# Altium PCB ESC.PcbDoc
Units mil, origin at the board's own origin, x right, y up, seen from the top; angles counter-clockwise.
Board outline 3605 x 1700 mil, 2 copper layers (Top Layer, Bottom Layer); 115 components, 68 nets, 363 pads, 12 vias.
Unrouted connection lines stored in the file: 183.
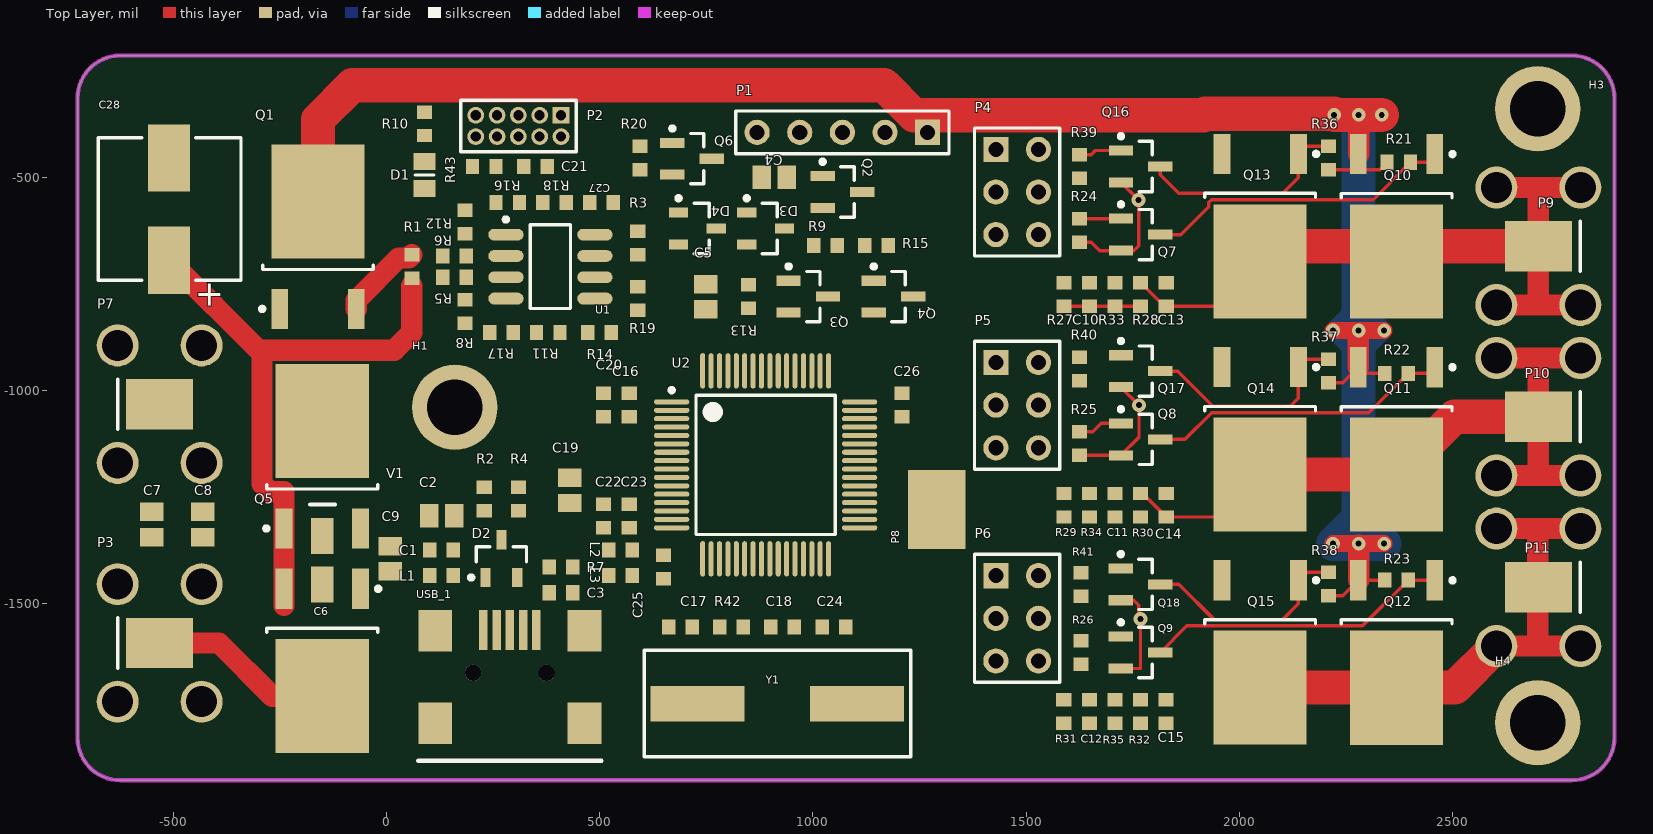
[diagram p0: Top Layer view]
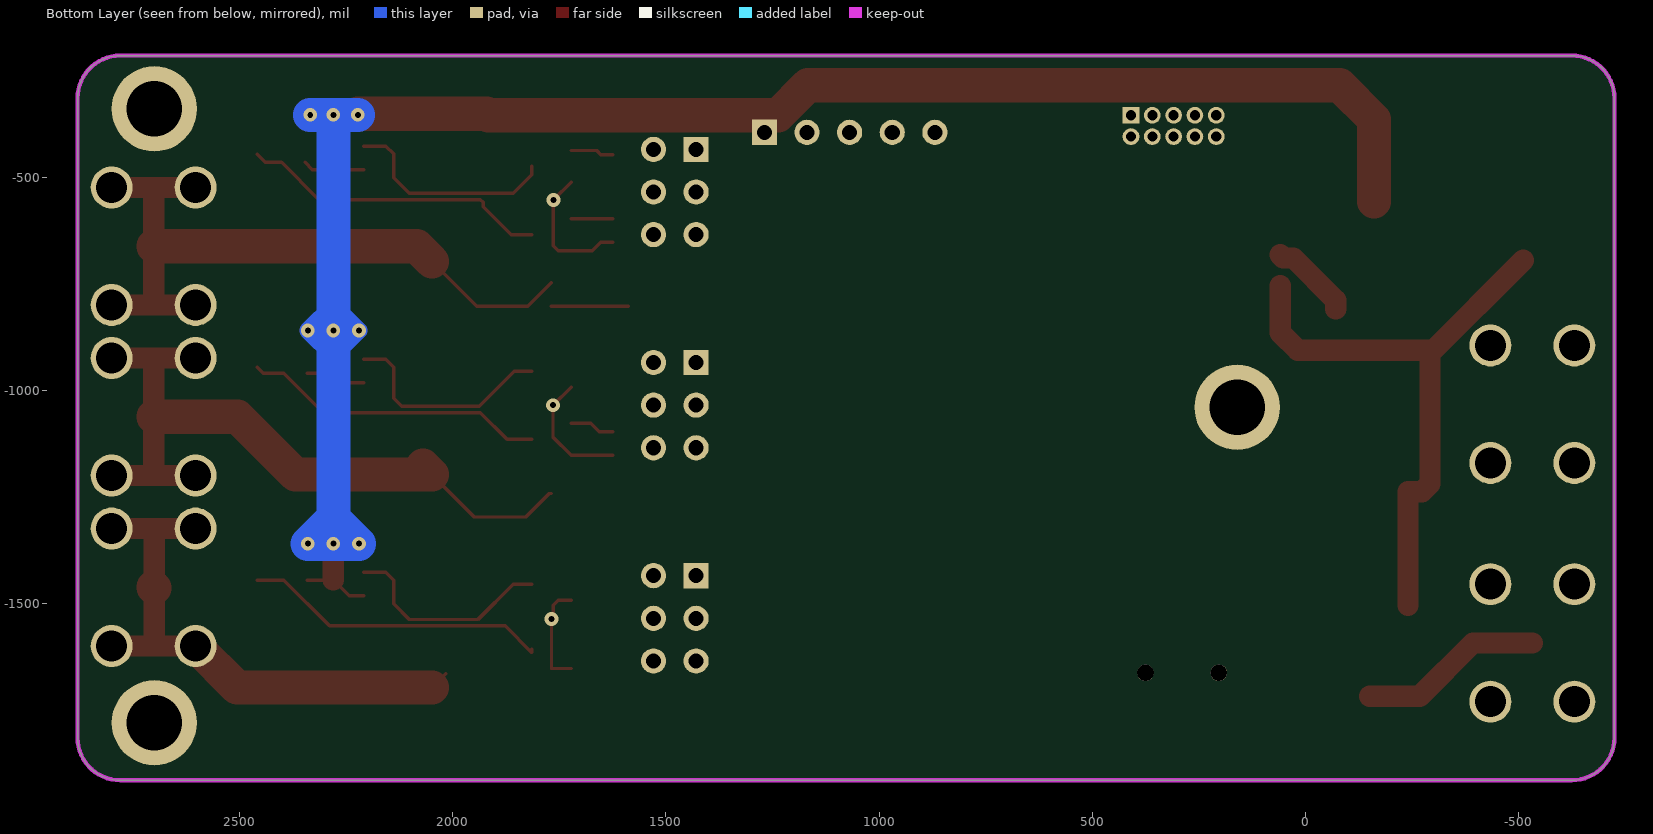
[diagram p1: Bottom Layer view, seen from below]

## Layer stack, top to bottom
Top Solder: solder mask 0.4, Solder Resist, Dk 3.5
Top Layer: signal copper 1.4
Dielectric1: dielectric 12.6, FR-4, Dk 4.8
Bottom Layer: signal copper 1.4
Bottom Solder: solder mask 0.4, Solder Resist, Dk 3.5

## Board outline
-625,-1915 cw(c-625,-1815) -725,-1815 -725,-315 cw(c-625,-315) -625,-215 2780,-215 cw(c2780,-315) 2880,-315 2880,-1815 cw(c2780,-1815) 2780,-1915

## Design rules (kind name [scope] priority, off if disabled: settings)
AssemblyTestPointUsage [All] p1 off:
AssemblyTestpoint [All] p1 off: testpointundercomponent=TRUE minsize=40 maxsize=100 preferedsize=60 minholesize=0 maxholesize=40 preferedholesize=32 testpointgrid=1 usegrid=TRUE gridtolerance=0.01 allowsidetop=TRUE allowsidebottom=TRUE
Clearance Clearance_1 [IsVia vs IsVia] p1: gap=10
Clearance [All] p2: gap=7
DiffPairsRouting [All] p1: maxlimit=200 minlimit=10 mostfreqgap=10 toplayer_minwidth=15 toplayer_maxwidth=15 toplayer_prefwidth=15 bottomlayer_minwidth=15 bottomlayer_maxwidth=15 bottomlayer_prefwidth=15 maxuncoupledlength=1000
FabricationTestPointUsage [All] p1 off: valid=0 allowmultiple=FALSE
FabricationTestpoint [All] p1 off: side=3 testpointundercomponent=TRUE minsize=40 maxsize=100 preferedsize=60 minholesize=0 maxholesize=40 preferedholesize=32 testpointgrid=1 allowsidetop=TRUE allowsidebottom=TRUE usegrid=TRUE gridtolerance=0.01
HoleSize [All] p1: absolutevalues=TRUE maxlimit=250 minlimit=1 maxpercent=80.000 minpercent=20.000
HoleToHoleClearance [All] p1: gap=12 allowstackedmicrovias=FALSE
MinimumSolderMaskSliver [All] p1: minsoldermaskwidth=6
PlaneConnect [All] p1: planeconnectstyle=Relief reliefexpansion=20 reliefentries=4 reliefconductorwidth=20 reliefairgap=10
PolygonConnect PolygonConnect_1 [(InPadClass('All Pads'))] p1: connectstyle=Relief reliefconductorwidth=10 reliefentries=4 polygonreliefangle="90 Angle" airgapwidth=10
PolygonConnect [All] p2: connectstyle=Direct reliefconductorwidth=10 reliefentries=4 polygonreliefangle="90 Angle" airgapwidth=10
RoutingVias [All] p1: holewidth=14 width=32 viastyle="Through Hole" minholewidth=14 minwidth=32 maxholewidth=14 maxwidth=32
SilkToSilkClearance [All] p1: silktosilkclearance=4
SilkToSolderMaskClearance SilkscreenOverComponentPads [IsPad] p1: minsilkscreentomaskgap=4 clearancetoexposedcopper=TRUE
SolderMaskExpansion SolderMaskExpansion_4 [InComponent('U4')] p1: expansion=2
SolderMaskExpansion SolderMaskExpansion_5 [InComponent('USB_1')] p2: expansion=2
SolderMaskExpansion SolderMaskExpansion_6 [InComponent('U2')] p3: expansion=6
SolderMaskExpansion SolderMaskExpansion_3 [InComponent('U8')] p4: expansion=2
SolderMaskExpansion SolderMaskExpansion_2 [InComponent('U6')] p5: expansion=6
SolderMaskExpansion SolderMaskExpansion_1 [InComponent('U9')] p6: expansion=6
SolderMaskExpansion [InComponent('U6')] p7: expansion=4
UnpouredPolygon [All] p1: allowunpoured=FALSE
Width Width_3 [InNet('GND')] p1: maxlimit=40 minlimit=6 preferedwidth=12
Width Width_2 [InNet('3.3V')] p2: maxlimit=40 minlimit=6 preferedwidth=12
Width Width_1 [InNet('5V')] p3: maxlimit=40 minlimit=6 preferedwidth=12
Width [All] p4: maxlimit=80 minlimit=8 preferedwidth=8 minimp=50.000000 maximp=50.000000 favimp=50.000000
18 further rules are at their usual default settings.

## Classes and differential pairs
differential pair U: +U_P -U_N
differential pair USB_MCU: +USB_MCU_P -USB_MCU_N

## Components (designator, comment, footprint, x,y, rotation, side; value= is the part's Value field where it differs from the comment)
C1 "0805" 1608[0603] 129.01,-1375 r0 top
C2 "0805" C0805 129.01,-1295 r0 top
C3 "0805" 1608[0603] 409.01,-1475 r180 top
C4 "0805" C0805 909.01,-500.51 r0 top
C5 "0805" C0805 749.01,-780.51 r270 top
C6 "Cap Pol1" 1206_C -150.99,-1398.78 r270 top
C7 "Cap" C0805 -550.99,-1315 r270 top
C8 "Cap" C0805 -430.99,-1315 r90 top
C9 "Cap" C0805 9.01,-1395 r90 top
C10 "0805" 1608[0603] 1648.7,-775 r270 top
C11 "0805" 1608[0603] 1708.7,-1269.76 r270 top
C12 "0805" 1608[0603] 1648.38,-1754.02 r270 top
C13 "0805" 1608[0603] 1828.7,-775 r270 top
C14 "0805" 1608[0603] 1828.7,-1269.76 r270 top
C15 "0805" 1608[0603] 1828.38,-1754.02 r270 top
C16 "0805" 1608[0603] 569.01,-1035 r90 top
C17 "0805" 1608[0603] 689.01,-1555 r0 top
C18 "0805" 1608[0603] 929.01,-1555 r180 top
C19 "0805" C0805 429.01,-1235 r270 top
C20 "0805" 1608[0603] 509.01,-1035 r270 top
C21 "0805" 1608[0603] 349.01,-475 r180 top
C22 "0805" 1608[0603] 509.01,-1295 r90 top
C23 "0805" 1608[0603] 569.01,-1295 r90 top
C24 "0805" 1608[0603] 1049.01,-1555 r180 top
C25 "0805" 1608[0603] 649.01,-1415 r90 top
C26 "0805" 1608[0603] 1209.01,-1035 r270 top
C27 "0805" 1608[0603] 504.01,-560 r0 top
C28 "Cap Pol1" ELE_CAP -510.99,-695 r180 top
D1 "LED3" 6-0805_L 89.01,-495 r90 top
D2 "Bat45C" SOT-23B_N 269.01,-1395 r90 top
D3 "Bat45C" SOT-23B_N 889.01,-620.51 r0 top
D4 "Bat45C" SOT-23B_N 729.01,-620.51 r0 top
H1 "stand_off" 4-40_screw_hole 160,-1040 r0 top
H3 "stand_off" 4-40_screw_hole 2700,-340 r0 top
H4 "stand_off" 4-40_screw_hole 2700,-1780 r0 top
L1 "FB" 1608[0603] 129.01,-1435 r0 top
L2 "FB" 1608[0603] 549.01,-1375 r0 top
L3 "FB" 1608[0603] 549.01,-1435 r0 top
P1 "Header 5" HDR1X5 1269.01,-395 r180 top
P2 "Header 5X2" MHDR2X5 409.01,-355 r180 top
P3 "Header" 8191_K -630.99,-1455 r0 top
P4 "Header 3X2" HDR2X3 1429.01,-435 r270 top
P5 "Header 3X2" HDR2X3 1429.01,-935 r270 top
P6 "Header 3X2" HDR2X3 1429.01,-1435 r270 top
P7 "Header" 8191_K -630.99,-895 r0 top
P8 "GND_CLIP" GND_CLIP 1290,-1280 r90 top
P9 "Header" 8191_K 2800,-800 r180 top
P10 "Header" 8191_K 2800,-1200 r180 top
P11 "Header" 8191_K 2800,-1600 r180 top
Q1 "PMOS-2" TO228P970-3_4AM -160.99,-640 r90 top
Q2 "PMOS-2" SOT-23_M 1069.01,-535 r0 top
Q3 "2N7002P" SOT-23_M 989.01,-780.51 r0 top
Q4 "2N7002P" SOT-23_M 1189.01,-780.51 r0 top
Q5 "PMOS-2" TO228P970-3_4AM -150.99,-1635 r270 top
Q6 "2N7002P" SOT-23_M 716.57,-457 r0 top
Q7 "2N7002P" SOT-23_M 1768.7,-635 r0 top
Q8 "2N7002P" SOT-23_M 1768.7,-1115.31 r0 top
Q9 "2N7002P" SOT-23_M 1768.38,-1615.31 r0 top
Q10 "PMOS-2" TO228P970-3_4AM 2369.01,-615.31 r270 top
Q11 "PMOS-2" TO228P970-3_4AM 2369.01,-1115.31 r270 top
Q12 "PMOS-2" TO228P970-3_4AM 2369.01,-1615.31 r270 top
Q13 "NMOS-2" TO228P970-3_4AM 2049.01,-615 r270 top
Q14 "NMOS-2" TO228P970-3_4AM 2049.01,-1115 r270 top
Q15 "NMOS-2" TO228P970-3_4AM 2049.01,-1615 r270 top
Q16 "2N7002P" SOT-23_M 1768.7,-475 r0 top
Q17 "2N7002P" SOT-23_M 1768.7,-955.31 r0 top
Q18 "2N7002P" SOT-23_M 1768.38,-1455.31 r0 top
R1 "Res1" 1608[0603] 59.01,-710 r90 top
R2 "Res1" 1608[0603] 229.01,-1255 r90 top
R3 "Res1" 1608[0603] 589.01,-655 r270 top
R4 "Res1" 1608[0603] 309.01,-1255 r90 top
R5 "Res1" 1608[0603] 159.01,-735 r0 top
R6 "Res1" 1608[0603] 159.01,-685 r180 top
R7 "Res1" 1608[0603] 409.01,-1415 r0 top
R8 "Res1" 1608[0603] 184.01,-815 r90 top
R9 "Res1" 1608[0603] 1029.01,-660.51 r0 top
R10 "Res1" 1608[0603] 89.01,-375 r90 top
R11 "Res1" 1608[0603] 379.01,-865 r180 top
R12 "Res1" 1608[0603] 184.01,-605 r270 top
R13 "Res1" 1608[0603] 849.01,-780.51 r270 top
R14 "Res1" 1608[0603] 499.01,-865 r0 top
R15 "Res1" 1608[0603] 1149.01,-660.51 r0 top
R16 "Res1" 1608[0603] 284.01,-560 r180 top
R17 "Res1" 1608[0603] 269.01,-865 r180 top
R18 "Res1" 1608[0603] 394.01,-560 r180 top
R19 "Res1" 1608[0603] 589.01,-785 r90 top
R20 "Res1" 1608[0603] 594.57,-455 r270 top
R21 "Res1" 1608[0603] 2374.01,-465.31 r0 top
R22 "Res1" 1608[0603] 2369.01,-960.31 r0 top
R23 "Res1" 1608[0603] 2369.01,-1445.31 r0 top
R24 "Res1" 1608[0603] 1625,-625 r270 top
R25 "Res1" 1608[0603] 1625,-1125 r270 top
R26 "Res1" 1608[0603] 1628.38,-1615.31 r270 top
R27 "Res1" 1608[0603] 1588.7,-775 r90 top
R28 "Res1" 1608[0603] 1768.7,-775 r270 top
R29 "Res1" 1608[0603] 1588.7,-1269.76 r270 top
R30 "Res1" 1608[0603] 1768.7,-1269.76 r270 top
R31 "Res1" 1608[0603] 1588.38,-1754.02 r90 top
R32 "Res1" 1608[0603] 1768.38,-1754.02 r270 top
R33 "Res1" 1608[0603] 1708.7,-775 r90 top
R34 "Res1" 1608[0603] 1648.7,-1269.76 r90 top
R35 "Res1" 1608[0603] 1708.38,-1754.02 r90 top
R36 "Res1" 1608[0603] 2209.01,-455 r90 top
R37 "Res1" 1608[0603] 2209.01,-955 r90 top
R38 "Res1" 1608[0603] 2209.01,-1455 r90 top
R39 "Res1" 1608[0603] 1625,-475 r90 top
R40 "Res1" 1608[0603] 1625,-950 r90 top
R41 "Res1" 1608[0603] 1628.38,-1455.31 r90 top
R42 "Res1" 1608[0603] 809.01,-1555 r0 top
R43 "Res1" 1608[0603] 229.01,-475 r180 top
U1 "LM358" SOIC127P600-8BM 384.01,-710 r0 top
U2 "MKL25Z64VLH4" TSQFP50P1200X1200-64M 889.01,-1175 r0 top
USB_1 "USB-M2xFxx" USB-M2xFxx 289.01,-1515 r0 top
V1 "MC78M05 5V Reg" TO228P970-3_4AM -150.99,-1155 r90 top
Y1 "8MHz" crystal 729.01,-1735 r0 top

## Footprints (in the part's own frame and the unit in brackets; to place one, negate y for a bottom-side part, rotate by r counter-clockwise, add the part's x,y. Pads: shape width x height; smd on the part's side, far side on the other; paste and mask are expansions set on the pad)
4-40_screw_hole [mil] "4-40_screw_hole"
  round 200 hole 130: 1(0,0)
6-0805_L [mm] "Chip Resistor, Body 2.0x1.2mm, IPC High Density"
  rect 1x1.3 smd: 1(-0.8,0) 2(0.8,0)
  silkscreen extent 0,-0.55 0,0.55, body extent -1.07,-0.7 1.07,0.7, height 0.7
1206_C [mm] "1206_Cap"
  rect 2.15x1.35 smd: 1(-1.45,0) 2(1.45,0)
  silkscreen extent -3.33,-0.71 -3.33,0.76
1608[0603] [mm] "Chip Capacitor, Body 1.6x0.8mm, IPC High Density"
  rect 0.8x0.9 smd: 1(-0.7,0) 2(0.7,0)
  body extent -0.87,-0.48 0.87,0.48, height 1.3
8191_K [mm]
  round 2.5 hole 1.85: 1(0,-7) 1(0,0) 1(5,-7) 1(5,0)
  rect 4x3 smd: 1(2.5,-3.5)
  silkscreen extent 0,-5 0,-2
C0805 [mm] "Chip Capacitor, Body 2.0x1.3mm, IPC High Density"
  rect 1.1x1.4 smd: 1(-0.75,0) 2(0.75,0)
  body extent -1.1,-0.72 1.1,0.72, height 1.4
crystal [mil]
  rect 220x83 smd: 1(0,0) 2(374,0)
  silkscreen extent -125,-125 500,125, body extent -37,-95 413,95, height 20
ELE_CAP [mm]
  rect 2.5x4 smd: 1(0,0) 2(0,-6.1)
  silkscreen extent -4.3,-7.3 4.2,1.2
GND_CLIP [mil] "Ground clip for a probe"
  rect 185x135 smd: 1(0,0)
HDR1X5 [mm] "Connector; Header; 5 Position"
  rect 1.5x1.5 hole 0.9: 1(0,0)
  round 1.5 hole 0.9: 2(2.54,0) 3(5.08,0) 4(7.62,0) 5(10.16,0)
  silkscreen extent -1.27,-1.27 11.43,1.27
HDR2X3 [mm] "Connector; Header; 3x2 Position"
  rect 1.5x1.5 hole 0.9: 1(0,0)
  round 1.5 hole 0.9: 2(0,2.54) 3(2.54,0) 4(2.54,2.54) 5(5.08,0) 6(5.08,2.54)
  silkscreen extent -1.27,-1.27 6.35,3.81
MHDR2X5 [mm] "Connector; Header; 5x2 Position"
  rect 1x1 hole 0.6: 1(0,0)
  round 1 hole 0.6: 2(0,1.27) 3(1.27,0) 4(1.27,1.27) 5(2.54,0) 6(2.54,1.27) 7(3.81,0) 8(3.81,1.27) 9(5.08,0) 10(5.08,1.27)
  silkscreen extent -0.9,-0.9 5.98,2.17
SOIC127P600-8BM [mm] "SOIC, 8-Leads, Body 4.9x3.9mm, Pitch 1.27mm, IPC Low Density"
  oval 2.1x0.7 smd: 1(-2.65,1.905) 2(-2.65,0.635) 3(-2.65,-0.635) 4(-2.65,-1.905) 5(2.65,-1.905) 6(2.65,-0.635) 7(2.65,0.635) 8(2.65,1.905)
  silkscreen extent -2.77,-2.5 1.2,2.93, body extent -2,-2.5 2,2.5, height 2.59
SOT-23_M [mm] "SOT23, 3-Leads, Body 2.9x1.3mm, Pitch 0.95mm, Lead Span 2.5mm, IPC Low Density"
  rect 1.45x0.6 smd: 1(-1.175,0.95) 2(-1.175,-0.95) 3(1.175,0)
  silkscreen extent -1.3,-1.5 0.7,1.92, body extent -0.7,-1.5 0.7,1.5, height 1.1
SOT-23B_N [mm] "SOT23, 3-Leads, Body 2.9x1.3mm, Pitch 0.95mm, Lead Span 2.4mm, IPC Medium Density"
  rect 1.15x0.6 smd: 1(-1.125,0.95) 2(-1.125,-0.95) 3(1.125,0)
  silkscreen extent -1.25,-1.5 0.7,1.92, body extent -0.7,-1.5 0.7,1.5, height 1.14
TO228P970-3_4AM [mm] "D-PAK, 4-Leads, Body 6.1x6.5mm, Pitch 2.28mm, Lead Span 9.7mm, IPC Low Density"
  rect 2.4x1 smd: 1(-4.3,2.28) 3(-4.3,-2.28)
  rect 6.8x5.55 smd: 4(2.1,0)
  silkscreen extent -4.42,-3.3 -1.7,3.45, body extent -1.95,-3.3 4.25,3.3, height 2.4
TSQFP50P1200X1200-64M [mm] "Thin QFP, 64-Leads, Body 10x10mm, Pitch 0.5mm, IPC Low Density"
  oval 2.1x0.3 smd: 1(-5.6,3.75) 2(-5.6,3.25) 3(-5.6,2.75) 4(-5.6,2.25) 5(-5.6,1.75) 6(-5.6,1.25) 7(-5.6,0.75) 8(-5.6,0.25) 9(-5.6,-0.25) 10(-5.6,-0.75) 11(-5.6,-1.25) 12(-5.6,-1.75) 13(-5.6,-2.25) 14(-5.6,-2.75) 15(-5.6,-3.25) 16(-5.6,-3.75) 33(5.6,-3.75) 34(5.6,-3.25) 35(5.6,-2.75) 36(5.6,-2.25) 37(5.6,-1.75) 38(5.6,-1.25) 39(5.6,-0.75) 40(5.6,-0.25) 41(5.6,0.25) 42(5.6,0.75) 43(5.6,1.25) 44(5.6,1.75) 45(5.6,2.25) 46(5.6,2.75) 47(5.6,3.25) 48(5.6,3.75)
  oval 0.3x2.1 smd: 17(-3.75,-5.6) 18(-3.25,-5.6) 19(-2.75,-5.6) 20(-2.25,-5.6) 21(-1.75,-5.6) 22(-1.25,-5.6) 23(-0.75,-5.6) 24(-0.25,-5.6) 25(0.25,-5.6) 26(0.75,-5.6) 27(1.25,-5.6) 28(1.75,-5.6) 29(2.25,-5.6) 30(2.75,-5.6) 31(3.25,-5.6) 32(3.75,-5.6) 49(3.75,5.6) 50(3.25,5.6) 51(2.75,5.6) 52(2.25,5.6) 53(1.75,5.6) 54(1.25,5.6) 55(0.75,5.6) 56(0.25,5.6) 57(-0.25,5.6) 58(-0.75,5.6) 59(-1.25,5.6) 60(-1.75,5.6) 61(-2.25,5.6) 62(-2.75,5.6) 63(-3.25,5.6) 64(-3.75,5.6)
  silkscreen extent -5.72,-4.15 4.15,4.57, body extent -5,-5 5,5, height 1.6
USB-M2xFxx [mil] "USB Mini B connector SMD"
  rect 20x94 smd: 1(-62,-47) 2(-31,-47) 3(0,-47) 4(31,-47) 5(62,-47)
  rect 79x98 smd: 6(-175,-49) 7(-175,-266) 8(175,-266) 9(175,-49)
  round 39 hole 39: ""(-86,-148)
  round 39 hole 39 unplated: ""(86,-148)
  silkscreen extent -215,-354 215,-354

## Part data
C1 C2 C3 C4 C5 C10 C11 C12 C13 C14 C15 C16 C17 C18 C19 C20 C21 C22 C23 C24 C25 C26 C27: library part "Cap Semi", "Capacitor (Semiconductor SIM Model)"
C6 C28: "Polarized Capacitor (Radial)"
C7 C8 C9: "Capacitor"
D1: "Typical BLUE SiC LED"
L1 L2 L3: library part Inductor, "Inductor"
P1: "Header, 5-Pin"
P2: "Header, 5-Pin, Dual row"
P3 P7 P9 P10 P11: library part Header1h1
P4 P5 P6: "Header, 3-Pin, Dual row"
Q1 Q2 Q5 Q10 Q11 Q12: "P-Channel Power MOSFET"
Q13 Q14 Q15: "N-Channel Power MOSFET"
R1 R2 R3 R4 R5 R6 R7 R8 R9 R10 R11 R12 R13 R14 R15 R16 R17 R18 R19 R20 R21 R22 R23 R24 R25 R26 R27 R28 R29 R30 R31 R32 R33 R34 R35 R36 R37 R38 R39 R40 R41 R42 R43: "Resistor"
U1: "LM358 Op Amp"
U2: "MKL25Z64VLH4 MCU"
USB_1: "USB Mini-B for USB-M2xFxx"
V1: library part MCP1702, "MCP1702 5V REG"
Y1: library part XTAL, "Crystal Oscillator"

## Via types
v1: diameter 32, hole 14, Top Layer to Bottom Layer, 12 vias

## Nets (pads, with @x,y where several pads share a name; then routed paths per layer and width w, separated by ;. In a path a pad name is that pad's centre, name@x,y a point inside that pad or via, vN(x,y) a via of type N, cw(c..) or ccw(c..) an arc to the next point about the centre after c; other vN are vias at no path point)
3.3V: C16.2 C19.1 C20.1 C24.2 C25.2 C26.1 L2.2 P1.4 P2.1 R11.1 R39.1 R40.1 R41.1 R43.2 U2.3 U2.7 U2.30 U2.48
5V: C1.1 C2.1 C6.1 C9.2 L1.1 U2.8 V1.3
A_BLMA: P4.3
A_BLMA_1: P4.6 R27.2
A_BLMH: P4.1
A_BLMH_1: P4.4 Q7.1 R24.1 | length 97.5
  Top Layer w8: R24.1 1625.16,-597.6 Q7.1
A_BLML: P4.5
A_BLML_1: P4.2 Q16.1 R39.2 | length 101.5
  Top Layer w8: R39.2 1652.56,-447.44 1662.4,-437.6 Q16.1
B_BLMA: P5.3
B_BLMA_1: P5.6 R29.2
B_BLMH: P5.1
B_BLMH_1: P5.4 Q8.1 R25.1 | length 105.5
  Top Layer w8: R25.1 1656.77,-1097.44 1676.3,-1077.91 Q8.1
B_BLML: P5.5
B_BLML_1: P5.2 Q17.1 R40.2
C_BLMA: P6.3
C_BLMA_1: P6.6 R31.2
C_BLMH: P6.1
C_BLMH_1: P6.4 Q9.1 R26.1
C_BLML: P6.5
C_BLML_1: P6.2 Q18.1 R41.2
ESC_I_FB: R16.1 R18.2
EXTAL+: C17.2 R42.1 U2.32 Y1.1
EXTAL-: C18.2 R42.2 U2.33 Y1.2
GND: C1.2 C2.2 C3.2 C5.2 C6.2 C7.1 C8.1 C9.1 C10.1 C11.1 C12.1 C13.1 C14.1 C15.1 C16.1 C17.1 C18.1 C19.2 C20.2 C21.1 C24.1 C25.1 C26.2 C27.1 C28.2 D2.3 L3.2 P1.5 P2.3 P2.5 P7.1 P8.1 Q3.2 Q4.2 Q5.1 Q6.2 Q7.2 Q8.2 Q9.2 Q13.3 Q14.3 Q15.3 Q16.2 Q17.2 Q18.2 R7.1 R8.1 R10.2 R13.2 R17.2 R18.1 R20.2 R24.2 R25.2 R26.2 R33.2 R34.2 R35.2 U1.4 U2.4 U2.31 U2.47 USB_1.5 V1.4 | length 857.6
  Top Layer w8: R25.2 1722.28,-1152.56 Q8.2 1764.76,-1110.39 v1(1764.76,-1035.04) Q17.2 ; R24.2 1652.56,-652.56 1672.4,-672.4 Q7.2 1752.4,-672.4 1763.78,-661.03 v1(1763.78,-553.74) Q16.2 ; Q9.2 1767.28,-1652.72 1768.38,-1651.62 1768.38,-1544.1 1764.62,-1540.34 1764.62,-1504.62 1752.72,-1492.72 Q18.2
  Bottom Layer w8: v1(1763.78,-553.74) v1@1768.7,-553.74
  other v1: 1768.38,-1536.57
KL25_SWD_CLK: P2.4 U2.22
MC_PUMP: Q3.1 R13.1
NC1_ST: H1.1
NC3_ST: H3.1
NC4_ST: H4.1
NetC3_1: C3.1 R7.2 USB_1.6 USB_1.7 USB_1.8 USB_1.9
NetC4_1: C4.1 D3.1 D3.2 D4.3
NetC4_2: C4.2 Q2.3 R15.1
NetC10_2: C10.2 R27.1 R28.2 R33.1 | length 180
  Top Layer w8: R27.1 R33.1 R28.2
NetC11_2: C11.2 R29.1 R30.2 R34.1
NetC12_2: C12.2 R31.1 R32.2 R35.1
NetC22_1: C22.1 C23.1 L3.1 U2.15 U2.16
NetC22_2: C22.2 C23.2 L2.1 U2.13 U2.14
NetD1_2: D1.2 R10.1
NetL1_2: L1.2 USB_1.1
NetQ1_1: Q1.1 R3.2 R19.2 U1.7
NetQ1_3: Q1.3 R1.2 R3.1 R6.2 | length 194.6
  Top Layer w50: Q1.3 -70.99,-809.06 -70.99,-788.84 28.04,-689.81 51.64,-689.81 R1.2
NetQ2_1: Q2.1 Q3.3 Q4.1 R9.2
NetQ4_3: Q4.3 R15.2
NetQ6_3: Q6.3 R14.2 R19.1 U1.5
NetQ7_3: Q7.3 Q10.1 R21.2 | length 728
  Top Layer w8: Q7.3 1863.19,-635 1928.76,-569.43 1928.76,-559.26 1935.21,-552.82 2314.07,-552.82 R21.2 2439.49,-465.31 Q10.1
NetQ8_3: Q8.3 Q11.1 R22.2 | length 713.9
  Top Layer w8: Q8.3 1872.71,-1115.31 1935.21,-1052.82 2304.07,-1052.82 R22.2 2444.49,-960.31 Q11.1
NetQ9_3: Q9.3 Q12.1 R23.2 | length 722.4
  Top Layer w8: Q9.3@1814.64,-1607.78 Q9.3 1877.14,-1552.82 2289.07,-1552.82 R23.2 2397.28,-1446.02 Q12.1
NetQ13_1: Q13.1 Q16.3 R36.2 | length 510
  Top Layer w8: Q16.3 1814.96,-494.96 1857.82,-537.82 2102.18,-537.82 2138.78,-501.22 Q13.1 2157.05,-427.44 R36.2
NetQ14_1: Q14.1 Q17.3 R37.2 | length 516.9
  Top Layer w8: Q17.3 1855.31,-955.31 1937.82,-1037.82 2120,-1037.82 2138.78,-1019.04 Q14.1 2157.05,-927.44 R37.2
NetQ15_1: Q15.1 Q18.3 R38.2 | length 506.8
  Top Layer w8: Q18.3 1858.19,-1455.31 1940.69,-1537.82 2102.18,-1537.82 2138.78,-1501.22 Q15.1 2157.05,-1427.44 R38.2
NetR5_2: R5.2 R8.2 U1.3
NetR6_1: R6.1 R12.2 U1.2
NetR11_2: R11.2 R17.1 U1.6
NetR12_1: R12.1 R14.1 R16.2 U1.1
OC_RESET: Q6.1 R20.1
OUT1: C13.2 P9.1 Q10.4 Q13.4 R28.1 | length 1683.1
  Top Layer w8: R28.1 1823.82,-802.56 C13.2 1944.13,-802.56 Q13.4
  Top Layer w50: P9.1@2603.15,-800 2701.57,-800 ; P9.1@2603.15,-524.41 2701.57,-524.41 ; P9.1@2800,-800 2701.57,-800 ; P9.1@2800,-524.41 2701.57,-524.41 ; 2701.57,-800 2701.57,-524.41
  Top Layer w80: Q13.4 2084.49,-662.2 P9.1@2701.57,-662.2
OUT2: C14.2 P10.1 Q11.4 Q14.4 R30.1 | length 1752.3
  Top Layer w8: R30.1 1773.58,-1242.2 C14.2 1949.37,-1297.32 Q14.4
  Top Layer w50: P10.1@2603.15,-1200 2701.57,-1200 ; P10.1@2603.15,-924.41 2700,-924.41 ; P10.1@2800,-1200 2701.57,-1200 ; P10.1@2800,-924.41 2700,-924.41 ; 2700,-924.41 2701.57,-925.98 2701.57,-1200
  Top Layer w80: Q14.4@2069.49,-1177.2 Q14.4 2049.33,-1197.99 Q11.4 2504.8,-1062.2 P10.1@2701.57,-1062.2
OUT3: C15.2 P11.1 Q12.4 Q15.4 R32.1 | length 1312
  Top Layer w8: Q15.4@2016.53,-1665.2 Q15.4
  Top Layer w50: P11.1@2603.15,-1600 2700,-1600 ; P11.1@2603.15,-1324.41 2700,-1324.41 ; P11.1@2800,-1600 2700,-1600 ; P11.1@2800,-1324.41 2700,-1324.41 ; 2700,-1600 2700,-1463.78 2700,-1324.41
  Top Layer w80: Q15.4 2505.47,-1697.68 P11.1@2603.15,-1600 ; P11.1@2700,-1463.78 P11.1@2701.57,-1462.2
RST_TGTMCU: C21.2 P2.10 R43.1 U2.34
SWD_DIO_TGTMCU: P2.2 U2.25
U_N: D2.1 R2.1 USB_1.2
U_P: D2.2 R4.1 USB_1.3
USB_MCU_N: R2.2 U2.6
USB_MCU_P: R4.2 U2.5
VBAT: C8.2 C28.1 D3.3 P1.2 Q2.2 Q5.3 R1.1 R5.1 R9.1 V1.1 | length 1422.3
  Top Layer w50: C28.1 -292.24,-913.75 ; Q5.3@-240.75,-1504.76 Q5.3 V1.1 -240.75,-1238.18 -273.49,-1238.18 -292.24,-1219.44 -292.24,-913.75 ; 59.01,-755 59.01,-865 17.55,-906.46 -284.95,-906.46 -292.24,-913.75
VIN: C7.2 P3.1 Q5.4 | length 433.3
  Top Layer w50: P3.1@-532.56,-1592.8 -393.19,-1592.8 -268.31,-1717.68 Q5.4
VP1: D1.1 P1.1 Q1.4 Q10.3 Q11.3 Q12.3 R21.1 R22.1 R23.1 R36.1 R37.1 R38.1 | length 5558.4
  Top Layer w8: R38.1 2242.71,-1482.56 Q12.3 2279.96,-1445.31 R23.1 ; R37.1 2242.72,-982.56 Q11.3 2293.54,-960.31 R22.1 ; R36.1 2329.21,-482.56 R21.1
  Top Layer w40: v1(2220,-1360) v1(2280,-1360) v1(2340,-1360) ; v1(2220,-860) v1(2280,-860) v1(2340,-860)
  Top Layer w50: Q11.3 v1@2279.25,-864.6 ; Q12.3@2279.96,-1445.31 2279.96,-1363.89 v1@2280,-1363.85 ; Q10.3@2280,-446.02 v1(2280,-354.21)
  Top Layer w80: Q1.4 -160.99,-365 -80.68,-284.69 1166.93,-284.69 1237.24,-355 1916.56,-355 1920.1,-351.46 v1@2222.75,-351.46 ; v1(2222.75,-354.21) v1(2280,-354.21) v1(2334.21,-354.21)
  Bottom Layer w40: v1(2220,-860) 2280,-920 v1(2340,-860) ; v1(2220,-860) 2280,-800 v1(2340,-860) ; v1(2220,-860) v1(2280,-860) v1(2340,-860)
  Bottom Layer w80: v1(2222.75,-354.21) v1(2280,-354.21) ; v1(2334.21,-354.21) v1(2280,-354.21) ; v1(2280,-1360) 2280,-1300 ; v1(2280,-1360) v1(2340,-1360) 2280,-1300 ; v1(2280,-1360) v1(2220,-1360) 2280,-1300 ; 2280,-1300 2280,-920 v1(2280,-860) 2280,-800 v1(2280,-354.21)
VPUMP: C5.1 C27.2 D4.1 D4.2 P1.3 U1.8
pads on no net: P2.6 P2.7 P2.8 P2.9 U2.1 U2.2 U2.9 U2.10 U2.11 U2.12 U2.17 U2.18 U2.19 U2.20 U2.21 U2.23 U2.24 U2.26 U2.27 U2.28 U2.29 U2.35 U2.36 U2.37 U2.38 U2.39 U2.40 U2.41 U2.42 U2.43 U2.44 U2.45 U2.46 U2.49 U2.50 U2.51 U2.52 U2.53 U2.54 U2.55 U2.56 U2.57 U2.58 U2.59 U2.60 U2.61 U2.62 U2.63 U2.64 USB_1. USB_1.4

## Keep-outs
Keep-Out Layer:
  lines w10: -725,-1815 ccw(c-625,-1815) -625,-1915 2780,-1915 ccw(c2780,-1815) 2880,-1815 2880,-1100.99 2880,-909.01 2880,-315 ccw(c2780,-315) 2780,-215 -70.99,-215 -625,-215 ccw(c-625,-315) -725,-315 -725,-1815

## Silkscreen, mask and mechanical layers (free items; w line width, h text height)
Mechanical 3:
  text "ESC 10A Controller" at 327,131 h200
  text "Nathan Zimmerman" at -654,-2038 h100
  text "Rev 0.1" at -657,-2116 h100

## Dimensions
2880,-315 to -725,-315 on Mechanical 3
-725,-315 to 2880,-315 on Mechanical 3
-625,-1915 to -625,-215 on Mechanical 3
-625,-215 to -625,-1915 on Mechanical 3

## Text inside footprints (layer, text, board x,y; h text height)
C28: Top Overlay "+" at -381.06,-750.12 h60 r180